# Altium PCB FlightController.PcbDoc (part 1 of 2)
Units mm, origin at the board's own origin, x right, y up, seen from the top; angles counter-clockwise.
Board outline 33 x 33 mm, 4 copper layers (Top Layer, Layer 2, Layer 3, Bottom Layer), stack 0.603 mm thick; 71 components, 54 nets, 321 pads, 115 vias.
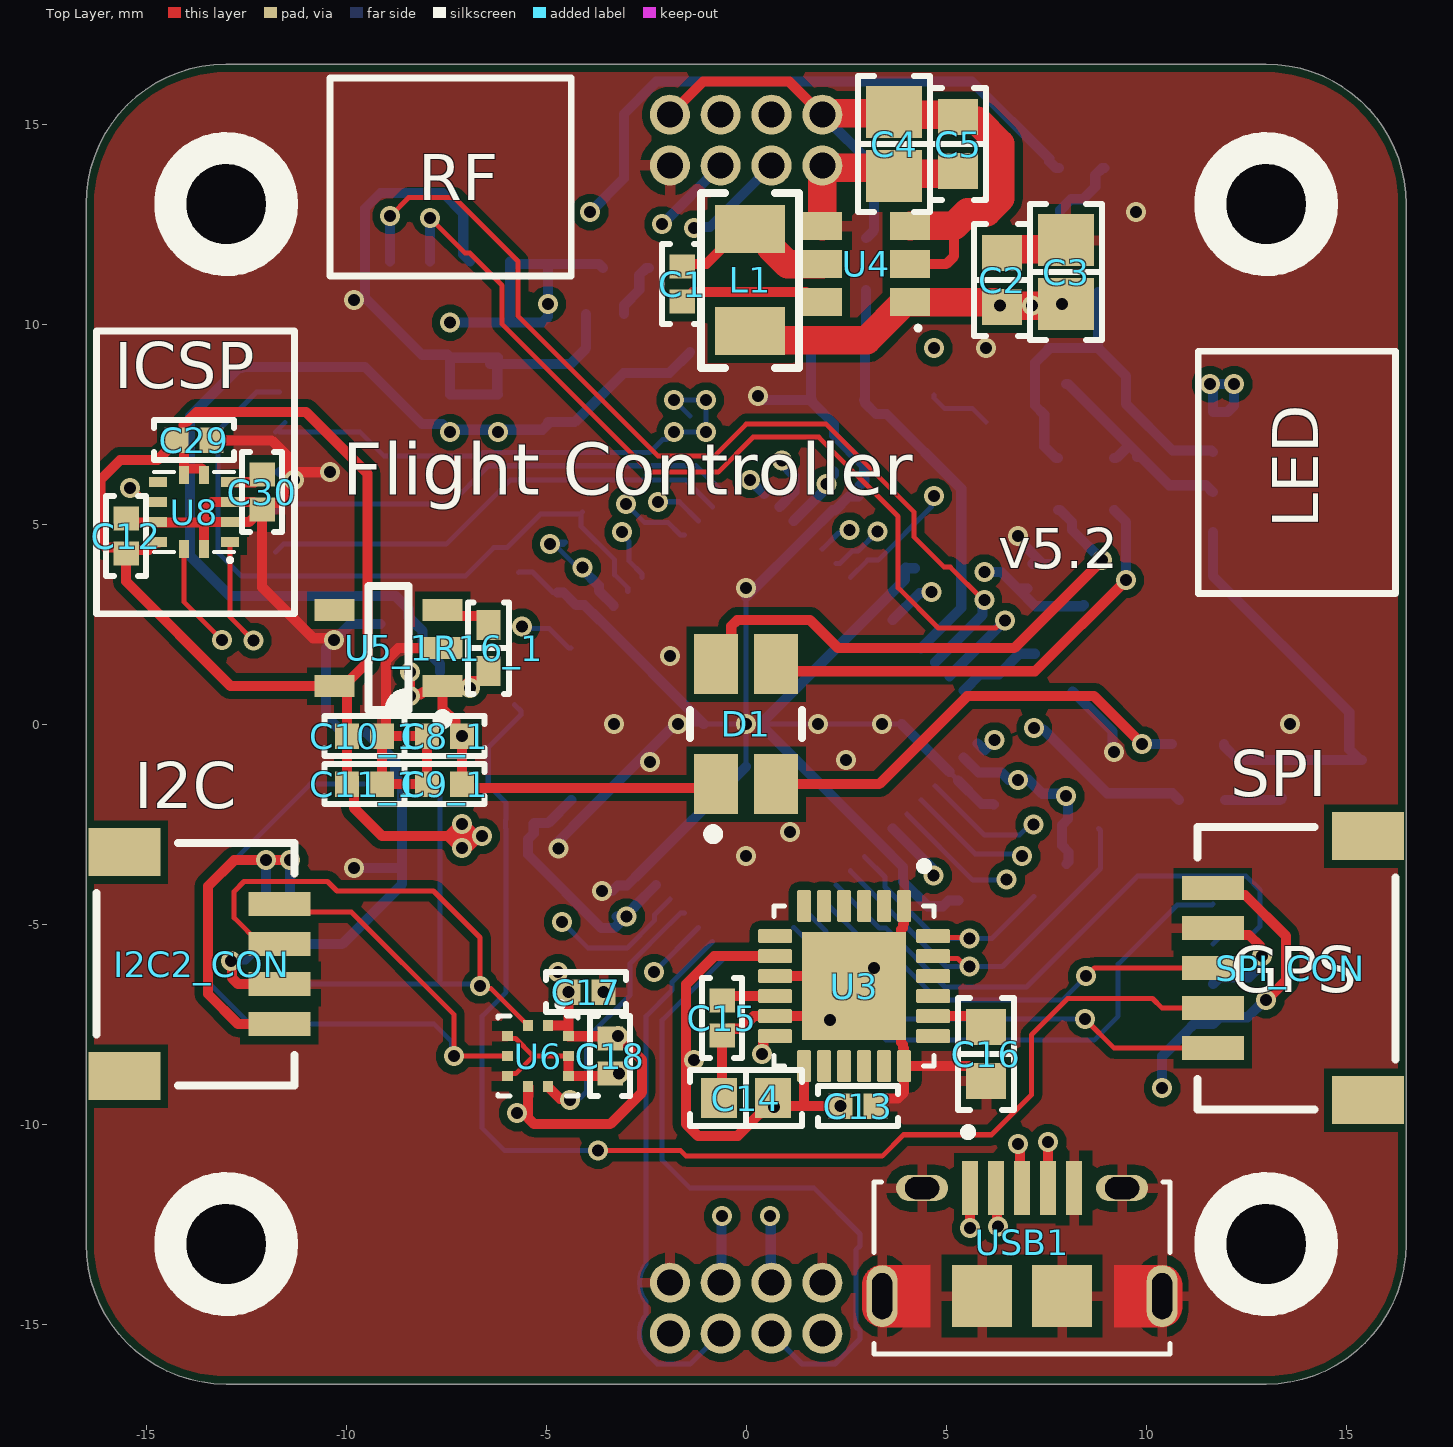
[diagram p0: Top Layer view]
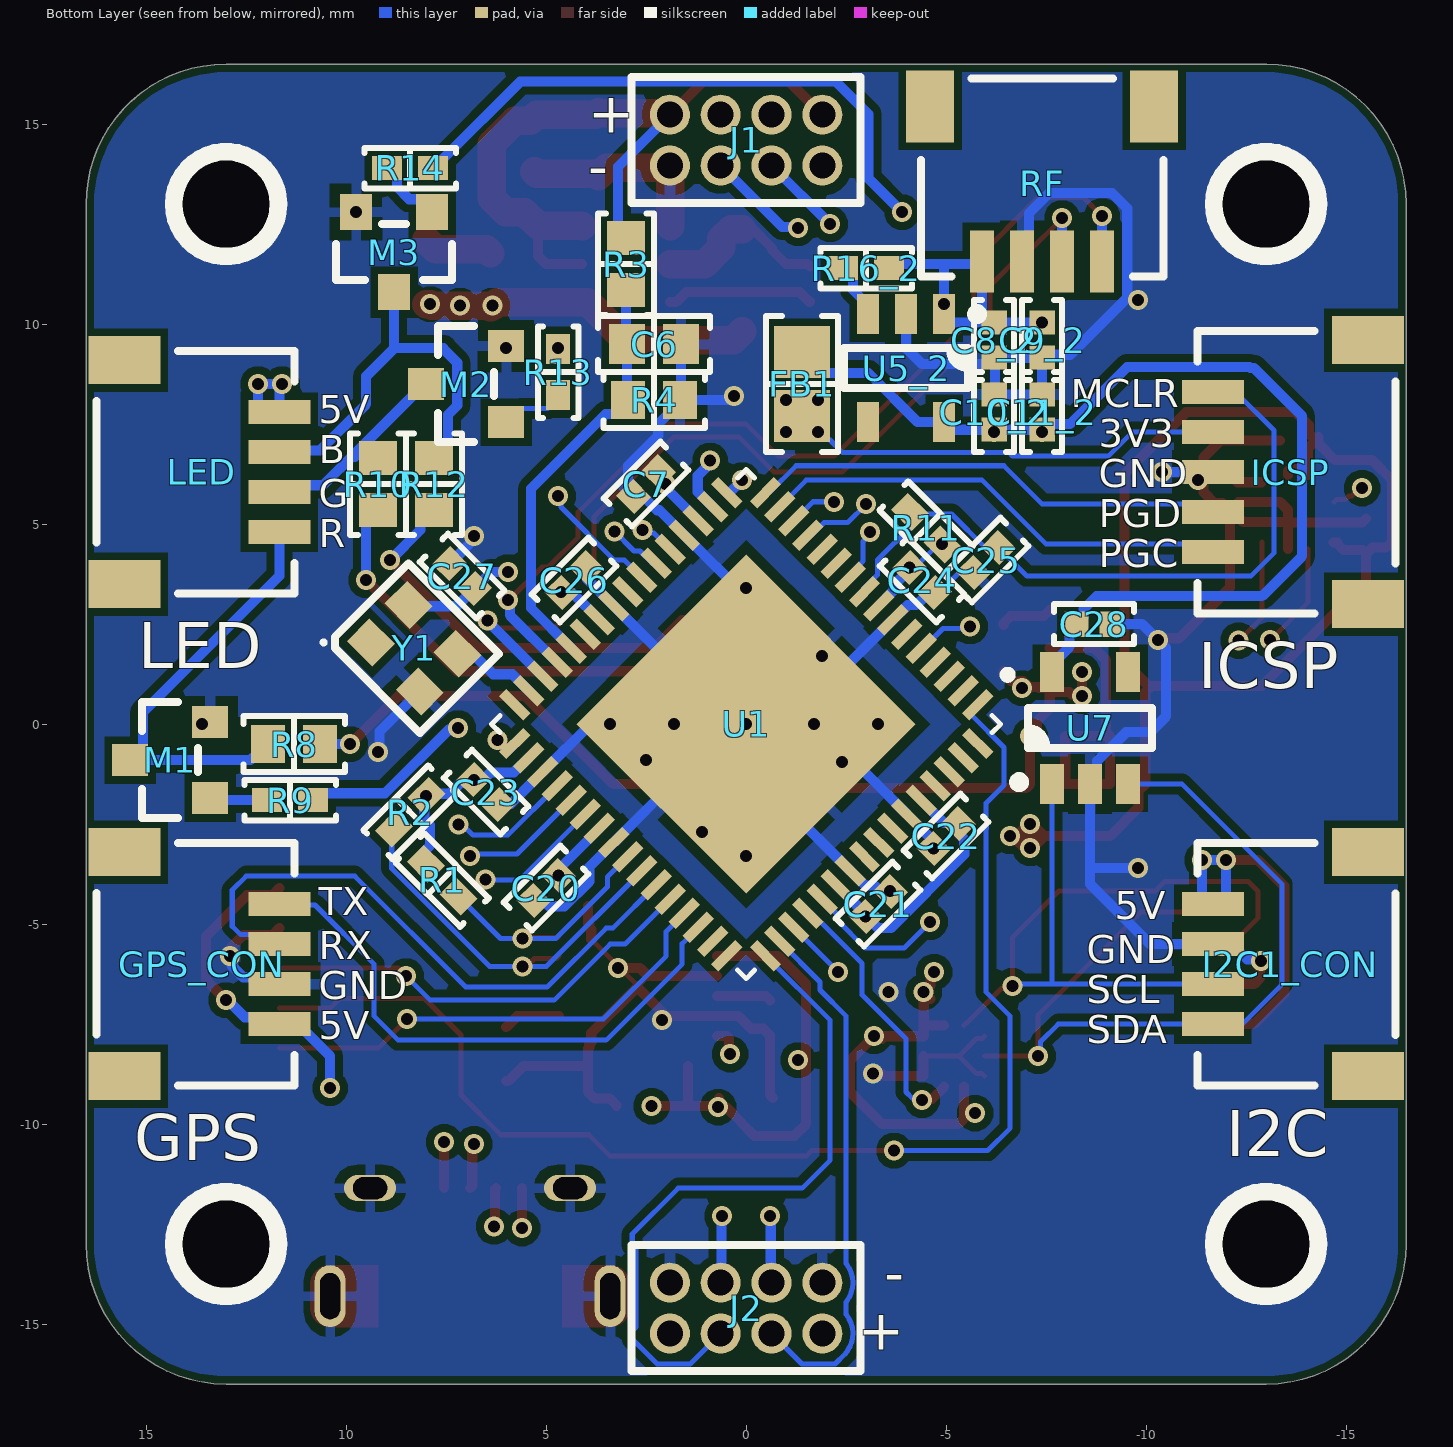
[diagram p1: Bottom Layer view, seen from below]
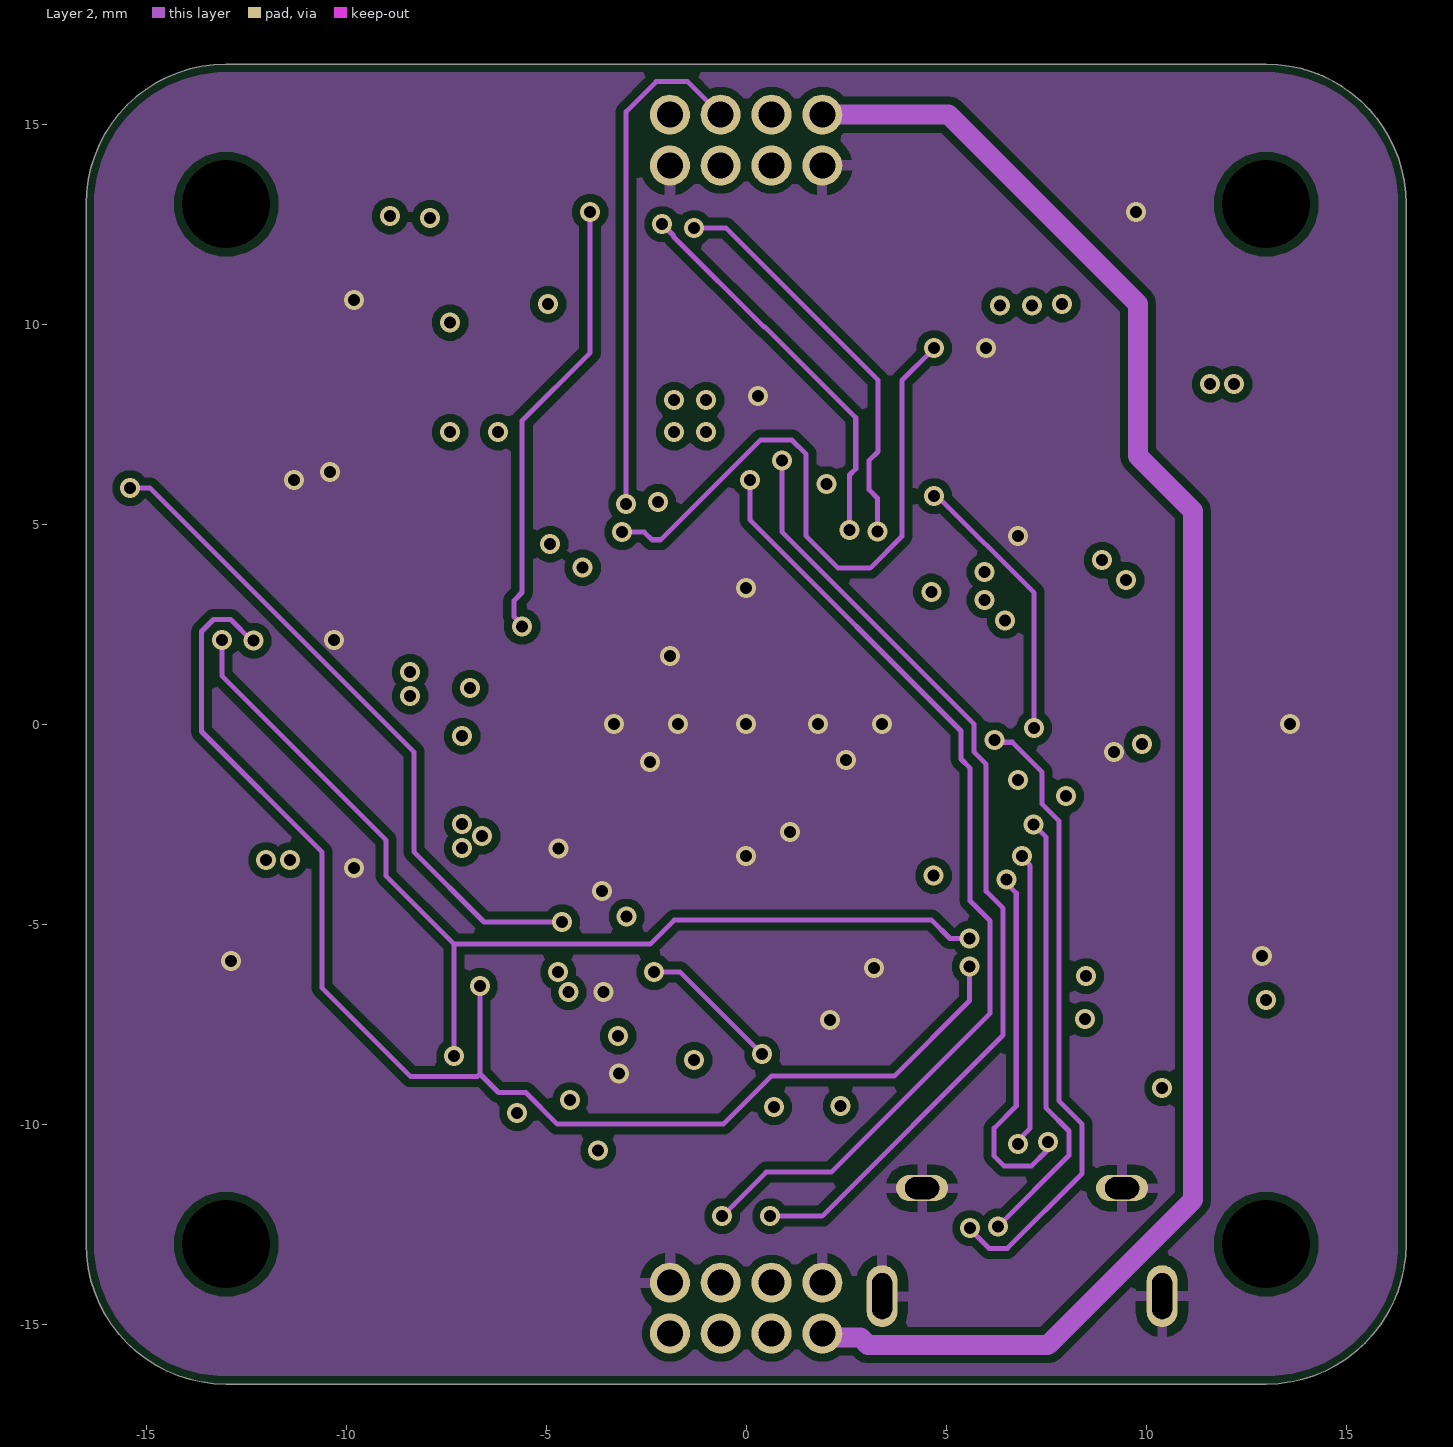
[diagram p2: Layer 2]
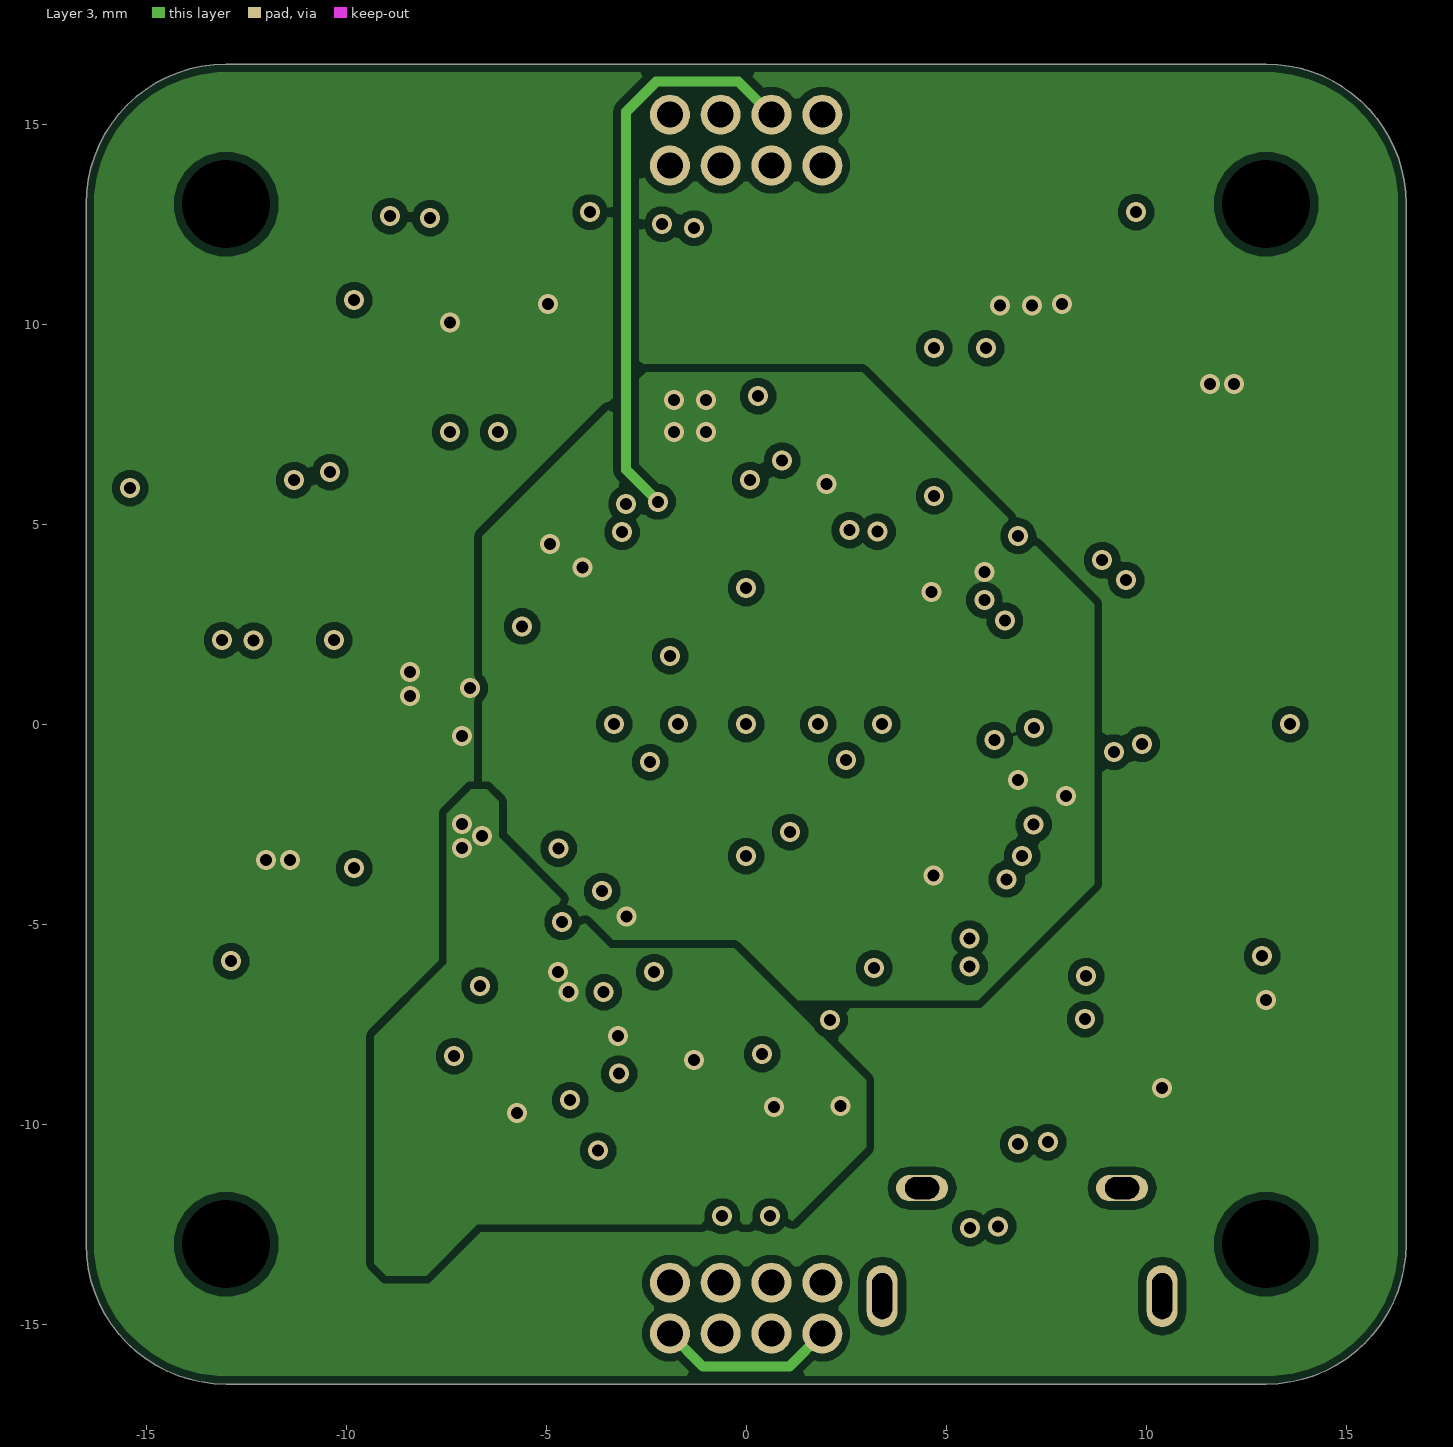
[diagram p3: Layer 3]

## Layer stack, top to bottom
Top Solder: solder mask 0.0102, Solder Resist, Dk 3.5
Top Layer: signal copper 0.0356
Dielectric 2: prepreg 0.0711, PP-006, Dk 4.1
Layer 2: signal copper 0.035
Dielectric 1: dielectric 0.32, FR-4, Dk 4.8
Layer 3: signal copper 0.035
Dielectric 3: prepreg 0.0711, PP-006, Dk 4.1
Bottom Layer: signal copper 0.0356
Bottom Solder: solder mask 0.0102, Solder Resist, Dk 3.5

## Board outline
-16.5,-13 -16.5,13 cw(c-13,13) -13,16.5 13,16.5 cw(c13,13) 16.5,13 16.5,-13 cw(c13,-13) 13,-16.5 -13,-16.5 cw(c-13,-13)

## Design rules (kind name [scope] priority, off if disabled: settings)
BoardOutlineClearance [All] p1: gap=0.2 ignorepadtopadclearanceinfootprint=FALSE
Clearance "PolyGon Pour Clearance" [InPolygon] p1: gap=0.2 ignorepadtopadclearanceinfootprint=FALSE
Clearance [All] p2: gap=0.2 ignorepadtopadclearanceinfootprint=TRUE except(0: Arc-Hole Track-Hole SMDPad-Hole THPad-Hole Via-Hole Fill-Hole Poly-Hole Region-Hole Text-Hole)
HoleSize [All] p1: absolutevalues=TRUE maxlimit=6.3 minlimit=0.02 maxpercent=80.000 minpercent=20.000
PolygonConnect PolygonRelief [IsPolygon and not (IsNamedPolygon('PolygonDirect'))] p1: thpad.connectstyle=Relief thpad.reliefconductorwidth=0.254 thpad.reliefentries=4 thpad.polygonreliefangle="90 Angle" thpad.airgapwidth=0.254 smdpad.connectstyle=Relief smdpad.reliefconductorwidth=0.254 smdpad.reliefentries=4 smdpad.polygonreliefangle="90 Angle" smdpad.airgapwidth=0.254 via.connectstyle=Direct via.reliefconductorwidth=0.254 via.reliefentries=4 via.polygonreliefangle="90 Angle" via.airgapwidth=0.254
PolygonConnect [All] p2: connectstyle=Direct reliefconductorwidth=0.254 reliefentries=4 polygonreliefangle="90 Angle" airgapwidth=0.254
RoutingVias [All] p1: holewidth=0.3 width=0.5 viastyle="Through Hole" minholewidth=0.3 minwidth=0.5 maxholewidth=0.7 maxwidth=1.27
SolderMaskExpansion [All] p1: expansion=0.102 istentingtop=FALSE
Width [All] p1: maxlimit=0.712 minlimit=0.127 preferedwidth=0.254
29 further rules are at their usual default settings.

## Classes and differential pairs
component class U_MPU6050: C13 C14 C15 C16 U3
component class U_LIS3MDL: C12 C29 C30 U8
component class U_BMP390: C17 C18 U6
component class U_5V_buck: C1 C2 C3 C4 C5 L1 U4
component class U_PIC32MZ: C6 C7 C20 C21 C22 C23 C24 C25 C26 C27 ICSP J1 J2 R1 R2 R3 R4 R11 U1 USB1 Y1
component class U_3V3_LDO_MCU: C8_2 C9_2 C10_2 C11_2 R16_2 U5_2
component class U_3V3_LDO_IMU: C8_1 C9_1 C10_1 C11_1 R16_1 U5_1
channel class 3V3_LDO: U_3V3_LDO_IMU U_3V3_LDO_MCU

## Components (designator, comment, footprint, x,y, rotation, side; value= is the part's Value field where it differs from the comment)
C1 "1 µF" "CAP 0402_1005" -1.6,11 r90 top
C2 "1µF" "CAP 0603_1608" 6.4,11.1 r270 top
C3 "22µF" "CAP 0805_2012" 8,11.3 r270 top
C4 "22µF" "CAP 0805_2012" 3.7,14.5 r90 top
C5 "0.1µF" "CAP 0603_1608" 5.3,14.5 r270 top
C6 "0.01µF" "CAP 0603_1608" 2.3,9.5 r180 bottom
C7 "0.1 µF" "CAP 0402_1005" 2.5,6 r135 bottom
C8_1 "1 µF" "CAP 0402_1005" -7.54,-0.3 r0 top (schematic designator C8)
C8_2 "1 µF" "CAP 0402_1005" -6.2,9.6 r90 bottom (schematic designator C8)
C9_1 "0.1 µF" "CAP 0402_1005" -7.54,-1.5 r0 top (schematic designator C9)
C9_2 "0.1 µF" "CAP 0402_1005" -7.4,9.6 r90 bottom (schematic designator C9)
C10_1 "0.1 µF" "CAP 0402_1005" -9.54,-0.3 r180 top (schematic designator C10)
C10_2 "0.1 µF" "CAP 0402_1005" -6.2,7.8 r270 bottom (schematic designator C10)
C11_1 "1 µF" "CAP 0402_1005" -9.54,-1.5 r180 top (schematic designator C11)
C11_2 "1 µF" "CAP 0402_1005" -7.4,7.8 r270 bottom (schematic designator C11)
C12 "1 µF" "CAP 0402_1005" -15.5,4.7 r90 top
C13 "0.1 µF" "CAP 0402_1005" 2.8,-9.55 r0 top
C14 "0.01µF" "CAP 0603_1608" 0,-9.35 r0 top
C15 "0.1 µF" "CAP 0402_1005" -0.6,-7.35 r270 top
C16 "2200pF" "CAP 0603_1608" 6,-8.25 r270 top
C17 "0.1 µF" "CAP 0402_1005" -4,-6.7 r180 top
C18 "0.1 µF" "CAP 0402_1005" -3.4,-8.3 r90 top
C20 "0.1 µF" "CAP 0402_1005" 5,-4.1 r135 bottom
C21 "0.1 µF" "CAP 0402_1005" -3.3,-4.5 r315 bottom
C22 "0.1 µF" "CAP 0402_1005" -5,-2.8 r135 bottom
C23 "0.1 µF" "CAP 0402_1005" 6.5,-1.7 r45 bottom
C24 "0.1 µF" "CAP 0402_1005" -4.4,3.6 r45 bottom
C25 "0.1 µF" "CAP 0402_1005" -6,4.1 r315 bottom
C26 "0.1 µF" "CAP 0402_1005" 4.3,3.6 r315 bottom
C27 "0.1 µF" "CAP 0402_1005" 7.1,3.7 r225 bottom
C28 "0.1 µF" "CAP 0402_1005" -8.7,2.5 r0 bottom
C29 "0.1 µF" "CAP 0402_1005" -13.8,7.1 r0 top
C30 "0.1 µF" "CAP 0402_1005" -12.1,5.8 r270 top
D1 "RGB LED 3228" "CreeLED 3228" 0,0 r90 top
FB1 "=Value" "FER 0805_2012" -1.4,8.5 r270 bottom
GPS_CON "SM04B-SRSS-TB(LF)(SN)" "JST SM04B-SRSS-TB" 13.7,-6 r90 bottom
I2C1_CON "SM04B-SRSS-TB(LF)(SN)" "JST SM04B-SRSS-TB" -13.7,-6 r270 bottom
I2C2_CON "SM04B-SRSS-TB(LF)(SN)" "JST SM04B-SRSS-TB" -13.7,-6 r90 top
ICSP "SM05B-SRSS-TB(LF)(SN)" "JST SM05B-SRSS-TB" -13.7,6.3 r270 bottom
J1 "62200821821" 62200821821 0,14.6 r180 bottom
J2 "62200821821" 62200821821 0,-14.6 r0 bottom
L1 "4.7µH" "IND 1008_2520" 0.1,11.1 r270 top
LED "SM04B-SRSS-TB(LF)(SN)" "JST SM04B-SRSS-TB" 13.7,6.3 r90 bottom
M1 "BSS123-7-F" "DIODES SOT-23-3" 14.4,-0.9 r0 bottom
M2 "BSS123-7-F" "DIODES SOT-23-3" 7,8.5 r0 bottom
M3 "BSS123-7-F" "DIODES SOT-23-3" 8.8,11.8 r270 bottom
R1 "4.7k Ohms" "RES 0402_1005" 7.6,-3.9 r45 bottom
R2 "4.7k Ohms" "RES 0402_1005" 8.4,-2.2 r135 bottom
R3 "10k" "RES 0603_1608" 3,11.5 r90 bottom
R4 "2k" "RES 0603_1608" 2.3,8.1 r0 bottom
R8 "330 Ohms" "RES 0603_1608" 11.3,-0.5 r180 bottom
R9 "1k Ohms" "RES 0402_1005" 11.4,-1.9 r180 bottom
R10 "330 Ohms" "RES 0603_1608" 9.2,6 r270 bottom
R11 "10k Ohms" "RES 0402_1005" -4.5,4.9 r225 bottom
R12 "330 Ohms" "RES 0603_1608" 7.8,6 r270 bottom
R13 "1k Ohms" "RES 0402_1005" 4.7,8.8 r90 bottom
R14 "1k Ohms" "RES 0402_1005" 8.4,13.9 r180 bottom
R16_1 "10k Ohms" "RES 0402_1005" -6.44,1.9 r270 top (schematic designator R16)
R16_2 "10k Ohms" "RES 0402_1005" -3,11.4 r180 bottom (schematic designator R16)
RF "SM04B-SRSS-TB(LF)(SN)" "JST SM04B-SRSS-TB" -7.4,13.6 r180 bottom
SPI_CON "SM05B-SRSS-TB(LF)(SN)" "JST SM05B-SRSS-TB" 13.7,-6.1 r270 top
U1 "PIC32MZ0512EFE064" QFN50P900X900X100-65N 0,0 r315 bottom
U3 "MPU6050" IC_MPU6050 2.7,-6.55 r270 top
U4 "5V Buck" "TSOT-26-6 - 3.2mm" 3,11.5 r270 top
U5_1 "MIC5504" "TI SOT-23-5 DBV" -8.94,1.9 r180 top (schematic designator U5)
U5_2 "MIC5504" "TI SOT-23-5 DBV" -4,8.9 r270 bottom (schematic designator U5)
U6 "BMP390" BMP390L -5.2,-8.3 r0 top
U7 "24LC00" SOT-23-5 -8.6,-0.1 r180 bottom
U8 "LIS3MDL" LGA12_ST -13.8,5.3 r180 top
USB1 "Mirco USB port" AMPHENOL_10118194-0001LF 6.9,-14.3 r0 top
Y1 "27MHz" "ABRACON ASD" 8.3,1.9 r225 bottom

## Footprints (in the part's own frame and the unit in brackets; to place one, negate y for a bottom-side part, rotate by r counter-clockwise, add the part's x,y. Pads: shape width x height; smd on the part's side, far side on the other; paste and mask are expansions set on the pad)
62200821821 [mm] "Socket Header, Pitch 1.27 mm, THT, Vertical, dual row, 8p"
  round 1 hole 0.65: 1(-1.905,-0.635) 2(-1.905,0.635) 3(-0.635,-0.635) 4(-0.635,0.635) 5(0.635,-0.635) 6(0.635,0.635) 7(1.905,-0.635) 8(1.905,0.635)
  silkscreen extent -2.87,-1.58 2.87,1.58, body extent -2.74,-1.5 2.74,1.5, height 4.55
"ABRACON ASD" [mm] "Crystal, 4-Leads, Body 2.00x2.45mm, Pitch 1.65mm, IPC Medium Density"
  rect 0.9x0.8 smd: 1(-0.865,-0.665) 2(0.865,-0.665) 3(0.865,0.665) 4(-0.865,0.665)
  silkscreen extent -1.75,-1.55 1.6,1.4, body extent -1.27,-1.02 1.28,1.03, height 1
AMPHENOL_10118194-0001LF [mm]
  rect 0.4x1.35 smd: 1(-1.3,2.7) 2(-0.65,2.7) 3(0,2.7) 4(0.65,2.7) 5(1.3,2.7)
  oval 1.3x0.65 hole 0.55 slot 0.85 at 0 deg: S1(-2.5,2.7) S2(2.5,2.7)
  oval 0.775x1.55 hole 0.5 slot 1.15 at 90 deg: S3(-3.5,0) S6(3.5,0)
  rect 1.5x1.55 smd: S4(-1,0) S5(1,0)
  Top Layer region: 193 vertices and 0 holes, not listed, extent -4,-0.775 -2.3,0.78
  Top Layer region: 193 vertices and 0 holes, not listed, extent 2.3,-0.78 4,0.775
  silkscreen extent -3.7,-1.45 3.7,4.2, body extent -4.02,-2.7 4.03,3.1, height 2.7
BMP390L [mm]
  rect 0.25x0.275 smd: 1(0.25,0.763) 2(-0.25,0.763) 6(-0.25,-0.763) 7(0.25,-0.763)
  rect 0.275x0.25 smd: 3(-0.763,0.5) 4(-0.763,0) 5(-0.763,-0.5) 8(0.763,-0.5) 9(0.763,0) 10(0.763,0.5)
  silkscreen extent -1,-1 1,1.36, body extent -1,-1 1,1, height 0.75
"CAP 0402_1005" [mm] "Chip Capacitor, 2-Leads, Body 1.02x0.51mm, IPC Medium Density"
  rect 0.6x0.64 smd: 1(-0.44,0) 2(0.44,0)
  silkscreen extent -1,-0.5 1,0.5, body extent -0.5,-0.26 0.5,0.26, height 0.52
"CAP 0603_1608" [mm] "Chip Capacitor, 2-Leads, Body 1.60x0.80mm, IPC Medium Density"
  rect 0.9x1 smd: 1(-0.675,0) 2(0.675,0)
  silkscreen extent -1.4,-0.7 1.4,0.7, body extent -0.8,-0.41 0.8,0.41, height 0.82
"CAP 0805_2012" [mm] "Chip Capacitor, 2-Leads, Body 2.00x1.20mm, IPC Medium Density"
  rect 1.3x1.4 smd: 1(-0.8,0) 2(0.8,0)
  silkscreen extent -1.7,-0.9 1.7,0.9, body extent -1,-0.64 1,0.64, height 1.26
"CreeLED 3228" [mm]
  rect 1.5x1.1 smd paste+0 mask+0: 1(-1.5,0.75) 2(-1.5,-0.75) 3(1.5,-0.75) 4(1.5,0.75)
  silkscreen extent -2.87,-1.4 0.35,1.4, body extent -1.75,-1.4 1.75,1.4, height 1.9
"DIODES SOT-23-3" [mm] "SOT23, 3-Leads, Body 2.90x2.40mm, Pitch 0.95mm, IPC Medium Density"
  rect 0.9x0.8 smd: 1(-1,0.95) 2(-1,-0.95) 3(1,0)
  silkscreen extent -0.7,-1.45 0.7,1.45, body extent -1.41,-1.45 1.41,1.45, height 1.5
"FER 0805_2012" [mm] "Chip Ferrite, 2-Leads, Body 2.00x1.20mm, IPC Medium Density"
  rect 1.3x1.4 smd: 1(-0.8,0) 2(0.8,0)
  silkscreen extent -1.7,-0.9 1.7,0.9, body extent -1,-0.64 1,0.64, height 1.26
IC_MPU6050 [mm]
  rrect25% 0.8x0.35 smd: 1(-2,1.25) 2(-2,0.75) 3(-2,0.25) 4(-2,-0.25) 5(-2,-0.75) 6(-2,-1.25) 13(2,-1.25) 14(2,-0.75) 15(2,-0.25) 16(2,0.25) 17(2,0.75) 18(2,1.25)
  rrect25% 0.35x0.85 smd: 7(-1.25,-1.975) 8(-0.75,-1.975) 9(-0.25,-1.975) 10(0.25,-1.975) 11(0.75,-1.975) 12(1.25,-1.975) 19(1.25,1.975) 20(0.75,1.975) 21(0.25,1.975) 22(-0.25,1.975) 23(-0.75,1.975) 24(-1.25,1.975)
  rect 2.7x2.6 smd paste-2: 25(0,0)
  silkscreen extent -3.1,-2 2,2, body extent -2,-2 2,2, height 0.93
"IND 1008_2520" [mm] "Chip Inductance, 2-leads, Body 2.5x2.1mm, IPC Medium Density"
  rect 1.2x1.75 smd: 1(-1.275,0) 2(1.275,0)
  silkscreen extent -2.18,-1.22 2.2,1.22, body extent -1.3,-1.05 1.3,1.05, height 1
"JST SM04B-SRSS-TB" [mm] "1.0mm pitch/Disconnectable Crimp style connector"
  rect 0.6x1.55 smd: 1(-1.5,-2.032) 2(-0.5,-2.032) 3(0.5,-2.032) 4(1.5,-2.032)
  rect 1.2x1.8 smd: M(-2.8,1.843) M(2.8,1.843)
  silkscreen extent -3.03,-2.41 3.03,2.54, body extent -3,-2.38 3,2.57, height 2.95
"JST SM05B-SRSS-TB" [mm] "1.0mm pitch/Disconnectable Crimp style connector"
  rect 0.6x1.55 smd: 1(-2,-2.032) 2(-1,-2.032) 3(0,-2.032) 4(1,-2.032) 5(2,-2.032)
  rect 1.2x1.8 smd: M(-3.3,1.843) M(3.3,1.843)
  silkscreen extent -3.53,-2.41 3.53,2.54, body extent -3.5,-2.38 3.5,2.57, height 2.95
LGA12_ST [mm]
  rect 0.45x0.25 smd: 1(-0.9,0.75) 2(-0.9,0.25) 3(-0.9,-0.25) 4(-0.9,-0.75) 7(0.9,-0.75) 8(0.9,-0.25) 9(0.9,0.25) 10(0.9,0.75)
  rect 0.25x0.45 smd: 5(-0.25,-0.925) 6(0.25,-0.925) 11(0.25,0.925) 12(-0.25,0.925)
  silkscreen extent -1,-1 1,1.25, body extent -1,-1 1,1, height 0.25
QFN50P900X900X100-65N [mm]
  rect 0.86x0.26 smd: 1(-4.435,3.75) 2(-4.435,3.25) 3(-4.435,2.75) 4(-4.435,2.25) 5(-4.435,1.75) 6(-4.435,1.25) 7(-4.435,0.75) 8(-4.435,0.25) 9(-4.435,-0.25) 10(-4.435,-0.75) 11(-4.435,-1.25) 12(-4.435,-1.75) 13(-4.435,-2.25) 14(-4.435,-2.75) 15(-4.435,-3.25) 16(-4.435,-3.75) 33(4.435,-3.75) 34(4.435,-3.25) 35(4.435,-2.75) 36(4.435,-2.25) 37(4.435,-1.75) 38(4.435,-1.25) 39(4.435,-0.75) 40(4.435,-0.25) 41(4.435,0.25) 42(4.435,0.75) 43(4.435,1.25) 44(4.435,1.75) 45(4.435,2.25) 46(4.435,2.75) 47(4.435,3.25) 48(4.435,3.75)
  rect 0.26x0.86 smd: 17(-3.75,-4.435) 18(-3.25,-4.435) 19(-2.75,-4.435) 20(-2.25,-4.435) 21(-1.75,-4.435) 22(-1.25,-4.435) 23(-0.75,-4.435) 24(-0.25,-4.435) 25(0.25,-4.435) 26(0.75,-4.435) 27(1.25,-4.435) 28(1.75,-4.435) 29(2.25,-4.435) 30(2.75,-4.435) 31(3.25,-4.435) 32(3.75,-4.435) 49(3.75,4.435) 50(3.25,4.435) 51(2.75,4.435) 52(2.25,4.435) 53(1.75,4.435) 54(1.25,4.435) 55(0.75,4.435) 56(0.25,4.435) 57(-0.25,4.435) 58(-0.75,4.435) 59(-1.25,4.435) 60(-1.75,4.435) 61(-2.25,4.435) 62(-2.75,4.435) 63(-3.25,4.435) 64(-3.75,4.435)
  rect 6x6 smd: 65(0,0)
  silkscreen extent -5.59,-4.5 4.5,4.5, body extent -4.52,-4.52 4.52,4.52, height 0.9
"RES 0402_1005" [mm] "Chip Resistor, 2-Leads, Body 1.0x0.5mm, IPC Medium Density"
  rect 0.75x0.6 smd: 1(-0.575,0) 2(0.575,0)
  silkscreen extent -1.14,-0.51 1.14,0.51, body extent -0.5,-0.25 0.5,0.25, height 0.35
"RES 0603_1608" [mm] "Chip Resistor, 2-Leads, Body 1.60x0.80mm, IPC Medium Density"
  rect 0.85x0.95 smd: 1(-0.65,0) 2(0.65,0)
  silkscreen extent -1.27,-0.7 1.27,0.7, body extent -0.8,-0.4 0.8,0.4, height 0.45
SOT-23-5 [mm]
  rect 0.6x1 smd: 1(-0.95,-1.4) 2(0,-1.4) 3(0.95,-1.4) 4(0.95,1.4) 5(-0.95,1.4)
  silkscreen extent -1.9,-1.47 1.55,0.5, body extent -1.48,-1.44 1.42,1.39, height 1.5
"TI SOT-23-5 DBV" [mm] "SOT23, 5-Leads, Body 2.90x2.80mm, Pitch 0.95mm, IPC Medium Density"
  rect 1x0.55 smd: 1(-1.35,0.95) 2(-1.35,0) 3(-1.35,-0.95) 4(1.35,-0.95) 5(1.35,0.95)
  silkscreen extent -1.48,-1.55 0.5,1.9, body extent -1.44,-1.42 1.39,1.48, height 1.5
"TSOT-26-6 - 3.2mm" [mm]
  rect 0.7x1 smd: 1(0.95,1.1) 2(0,1.1) 3(-0.95,1.1) 4(-0.95,-1.1) 5(0,-1.1) 6(0.95,-1.1)
  silkscreen extent 1.55,1.25 1.65,1.36, body extent -1.45,-1.2 1.45,1.2, height 1

## Part data
C1 C8_1 C8_2 C11_1 C11_2 C12: library part C0402C104K4RACAUTO, "CAP CER 0.1UF 16V X7R 0402", Capacitance="0.1 µF", Device Package="0402 (1005 Metric)", Manufacturer=KEMET, Operating Temperature="-55°C ~ 125°C", Ratings=AEC-Q200, Supplier Part Number 1=399-6828-1-ND, Temperature Coefficient=X7R, Tolerance=±10%, Voltage - Rated=16V, Applications="Automotive, Bypass, Decoupling", ComponentLink1Description=Datasheet, ComponentLink1URL=https://api.kemet.com/component-edge/download/specsheet/C0402C104K4RACAUTO.pdf, ComponentLink2Description="DigiKey Link", ComponentLink2URL=https://www.digikey.com/en/products/detail/kemet/C0402C104K4RACAUTO/3314827, LastUpdated="8/14/2022 9:05:51 PM", Lifecycle Status=Active, Minimum Order=1, Mounting Type="Surface Mount, MLCC", Package / Case="0402 (1005 Metric)", Packaging=TapeAndReel, Part Number=C0402C104K4RACAUTO, Part Status=Active, PartId=3024, Price=0.01, Series="SMD Auto X7R", Size / Dimension="0.039\" L x 0.020\" W (1.00mm x 0.50mm)", Supplier 1=DigiKey, Thickness (Max)="0.022\" (0.55mm)"
C2: library part GCJ188R71E105KA01D, "CAP CER 1UF 25V X7R 0603", Device Package="0603 (1608 Metric)", Manufacturer="Murata Electronics", Operating Temperature="-55°C ~ 125°C", Ratings=AEC-Q200, Supplier Part Number 1=490-14409-1-ND, Temperature Coefficient=X7R, Tolerance=±10%, Applications="Automotive, Boardflex Sensitive", Capacitance=1µF, ComponentLink1Description=Datasheet, ComponentLink1URL=https://search.murata.co.jp/Ceramy/image/img/A01X/G101/ENG/GCJ188R71E105KA01-01.pdf, ComponentLink2Description="DigiKey Link", ComponentLink2URL=http://digikey.com/product-detail/en/murata-electronics/GCJ188R71E105KA01D/490-14409-1-ND/6606870, Features="Soft Termination", LastUpdated="13-Aug-20 10:24:06 AM", Lifecycle Status=Active, Minimum Order=1, Mounting Type="Surface Mount, MLCC", Package / Case="0603 (1608 Metric)", Packaging=TapeAndReel, Part Number=GCJ188R71E105KA01D, Part Status=Active, PartId=9566, Price=0.05, Series=GCJ, Size / Dimension="0.063\" L x 0.031\" W (1.60mm x 0.80mm)", Supplier 1=DigiKey, Thickness (Max)="0.035\" (0.90mm)"
C3: library part CL21A226MOQNNNE, "CAP CER 22UF 16V X5R 0805", Device Package="0805 (2012 Metric)", Manufacturer="Samsung Electro-Mechanics", Operating Temperature="-55°C ~ 85°C", Supplier Part Number 1=1276-2909-1-ND, Temperature Coefficient=X5R, Tolerance=±20%, Voltage - Rated=16V, Applications="General Purpose", Capacitance=22µF, ComponentLink1Description=Datasheet, ComponentLink1URL=http://www.samsungsem.com/kr/support/product-search/mlcc/CL21A226MOQNNNE.jsp, ComponentLink2Description="DigiKey Link", ComponentLink2URL=http://digikey.com/product-detail/en/samsung-electro-mechanics/CL21A226MOQNNNE/1276-2909-1-ND/3890995, LastUpdated="21-Jan-20 12:03:05 AM", Lifecycle Status=Active, Minimum Order=1, Mounting Type="Surface Mount, MLCC", Package / Case="0805 (2012 Metric)", Packaging=TapeAndReel, Part Number=CL21A226MOQNNNE, Part Status=Active, PartId=3052, Price=0.11, Series=CL, Size / Dimension="0.079\" L x 0.049\" W (2.00mm x 1.25mm)", Supplier 1=DigiKey, Thickness (Max)="0.055\" (1.40mm)"
C4: library part C2012X7S1E106K125AC, "CAP CER 10UF 25V X7S 0805", Capacitance=10µF, Device Package="0805 (2012 Metric)", Manufacturer="TDK Corporation", Operating Temperature="-55°C ~ 125°C", Supplier Part Number 1=445-181600-1-ND, Temperature Coefficient=X7S, Tolerance=±10%, Voltage - Rated=25V, Applications="General Purpose", ComponentLink1Description=Datasheet, ComponentLink1URL=https://product.tdk.com/en/search/capacitor/ceramic/mlcc/info?part_no=C2012X7S1E106K125AC?ref_disty=digikey, ComponentLink2Description="DigiKey Link", ComponentLink2URL=http://digikey.com/product-detail/en/tdk-corporation/C2012X7S1E106K125AC/445-181600-1-ND/9991478, Features="Low ESL", LastUpdated="21-Jan-20 12:03:04 AM", Lifecycle Status=Active, Minimum Order=1, Mounting Type="Surface Mount, MLCC", Package / Case="0805 (2012 Metric)", Packaging=TapeAndReel, Part Number=C2012X7S1E106K125AC, Part Status=Active, PartId=3339, Price=0.15, Series=C, Size / Dimension="0.079\" L x 0.049\" W (2.00mm x 1.25mm)", Supplier 1=DigiKey, Thickness (Max)="0.057\" (1.45mm)"
C5: library part GCG188R92A104KA03D, "CAP CER 0.1UF 100V 0603 EPOXY", Device Package="0603 (1608 Metric)", Manufacturer="Murata Electronics", Operating Temperature="-55°C ~ 150°C", Ratings=AEC-Q200, Supplier Part Number 1=490-18197-1-ND, Temperature Coefficient=X8R, Tolerance=±10%, Voltage - Rated=100V, Applications=Automotive, Capacitance=0.1µF, ComponentLink1Description=Datasheet, ComponentLink1URL=https://search.murata.co.jp/Ceramy/image/img/A01X/G101/ENG/GCG188R92A104KA03-01.pdf, ComponentLink2Description="DigiKey Link", ComponentLink2URL=http://digikey.com/product-detail/en/murata-electronics/GCG188R92A104KA03D/490-18197-1-ND/9867926, Features="Epoxy Mountable", LastUpdated="21-Jan-20 12:01:59 AM", Lifecycle Status=Active, Minimum Order=1, Mounting Type="Surface Mount, MLCC, Epoxy", Package / Case="0603 (1608 Metric)", Packaging=TapeAndReel, Part Number=GCG188R92A104KA03D, Part Status=Active, PartId=9025, Price=0.07, Series=GCG, Size / Dimension="0.063\" L x 0.031\" W (1.60mm x 0.80mm)", Supplier 1=DigiKey, Thickness (Max)="0.035\" (0.90mm)"
C6: library part GCG188R92A104KA03D, "CAP CER 0.1UF 100V 0603 EPOXY", Capacitance=0.1µF, Device Package="0603 (1608 Metric)", Manufacturer="Murata Electronics", Operating Temperature="-55°C ~ 150°C", Ratings=AEC-Q200, Supplier Part Number 1=490-18197-1-ND, Temperature Coefficient=X8R, Tolerance=±10%, Voltage - Rated=100V, Applications=Automotive, ComponentLink1Description=Datasheet, ComponentLink1URL=https://search.murata.co.jp/Ceramy/image/img/A01X/G101/ENG/GCG188R92A104KA03-01.pdf, ComponentLink2Description="DigiKey Link", ComponentLink2URL=http://digikey.com/product-detail/en/murata-electronics/GCG188R92A104KA03D/490-18197-1-ND/9867926, Features="Epoxy Mountable", LastUpdated="21-Jan-20 12:01:59 AM", Lifecycle Status=Active, Minimum Order=1, Mounting Type="Surface Mount, MLCC, Epoxy", Package / Case="0603 (1608 Metric)", Packaging=TapeAndReel, Part Number=GCG188R92A104KA03D, Part Status=Active, PartId=9025, Price=0.07, Series=GCG, Size / Dimension="0.063\" L x 0.031\" W (1.60mm x 0.80mm)", Supplier 1=DigiKey, Thickness (Max)="0.035\" (0.90mm)"
C7 C9_1 C9_2 C10_1 C10_2 C13 C15 C17 C18 C20 C21 C22 C23 C24 C25 C26 C27 C28 C29 C30: library part C0402C104K4RACAUTO, "CAP CER 0.1UF 16V X7R 0402", Device Package="0402 (1005 Metric)", Manufacturer=KEMET, Operating Temperature="-55°C ~ 125°C", Ratings=AEC-Q200, Supplier Part Number 1=399-6828-1-ND, Temperature Coefficient=X7R, Tolerance=±10%, Voltage - Rated=16V, Applications="Automotive, Bypass, Decoupling", Capacitance="0.1 µF", ComponentLink1Description=Datasheet, ComponentLink1URL=https://api.kemet.com/component-edge/download/specsheet/C0402C104K4RACAUTO.pdf, ComponentLink2Description="DigiKey Link", ComponentLink2URL=https://www.digikey.com/en/products/detail/kemet/C0402C104K4RACAUTO/3314827, LastUpdated="8/14/2022 9:05:51 PM", Lifecycle Status=Active, Minimum Order=1, Mounting Type="Surface Mount, MLCC", Package / Case="0402 (1005 Metric)", Packaging=TapeAndReel, Part Number=C0402C104K4RACAUTO, Part Status=Active, PartId=3024, Price=0.01, Series="SMD Auto X7R", Size / Dimension="0.039\" L x 0.020\" W (1.00mm x 0.50mm)", Supplier 1=DigiKey, Thickness (Max)="0.022\" (0.55mm)"
C14: library part C0603C103KARACAUTO, "CAP CER 0.01UF 250V X7R 0603", Device Package="0603 (1608 Metric)", Manufacturer=KEMET, Operating Temperature="-55°C ~ 125°C", Ratings=AEC-Q200, Supplier Part Number 1=399-17960-1-ND, Temperature Coefficient=X7R, Tolerance=±10%, Applications="Automotive, Bypass, Decoupling", Capacitance=0.01µF, ComponentLink1Description=Datasheet, ComponentLink1URL=https://api.kemet.com/component-edge/download/datasheet/C0603C103KARACAUTO.pdf, ComponentLink2Description="DigiKey Link", ComponentLink2URL=http://digikey.com/product-detail/en/kemet/C0603C103KARACAUTO/399-17960-1-ND/9084030, LastUpdated="13-Aug-20 10:21:06 AM", Lifecycle Status=Active, Minimum Order=1, Mounting Type="Surface Mount, MLCC", Package / Case="0603 (1608 Metric)", Packaging=TapeAndReel, Part Number=C0603C103KARACAUTO, Part Status=Active, PartId=15195, Price=0.25, Series="SMD Auto X7R", Size / Dimension="0.063\" L x 0.031\" W (1.60mm x 0.80mm)", Supplier 1=DigiKey, Thickness (Max)="0.034\" (0.87mm)"
C16: library part CGA3E2X8R1H222M080AD, "CAP CER 2200PF 50V 0603 EPOXY", Device Package="0603 (1608 Metric)", Manufacturer="TDK Corporation", Operating Temperature="-55°C ~ 150°C", Ratings=AEC-Q200, Supplier Part Number 1=445-9890-1-ND, Temperature Coefficient=X8R, Tolerance=±20%, Applications=Automotive, Capacitance=2200pF, ComponentLink1Description=Datasheet, ComponentLink1URL=https://product.tdk.com/info/en/catalog/datasheets/mlcc_automotive_epoxy_en.pdf?ref_disty=digikey, ComponentLink2Description="DigiKey Link", ComponentLink2URL=http://digikey.com/product-detail/en/tdk-corporation/CGA3E2X8R1H222M080AD/445-9890-1-ND/3931817, Features="Epoxy Mountable", LastUpdated="13-Aug-20 10:19:25 AM", Lifecycle Status=Active, Minimum Order=1, Mounting Type="Surface Mount, MLCC, Epoxy", Package / Case="0603 (1608 Metric)", Packaging=TapeAndReel, Part Number=CGA3E2X8R1H222M080AD, Part Status=Active, PartId=17643, Price=0.05, Series=CGA, Size / Dimension="0.063\" L x 0.031\" W (1.60mm x 0.80mm)", Supplier 1=DigiKey, Thickness (Max)="0.031\" (0.80mm)"
D1: "DIODE LED RGB DIFFUSED 4LCC SMD CLV1L-FKB-CJ1N1E1BB7B3B3", Digikey Part Number=CLV1L-FKB-CHMMQEHBB7673673-ND, Manufacturer=Cree, Mouser Part Number=941-CLV1LFKBC7673673, Package=LED_3MM2X2MM8, Temperature="-40°C to +100°C", Temperature Range High=+100°C, Temperature Range Low=-40°C, ComponentLink1Description=Upverter, ComponentLink1URL=https://upverter.com/upn/revision/9d0b31f7b1982705/, ComponentLink2Description=Datasheet, ComponentLink2URL=http://www.cree.com/~/media/Files/Cree/LED-Components-and-Modules/HB/Data-Sheets/CLV1L-FKB-1238.pdf, Digikey Description="DIODE LED RGB DIFFUSED 4LCC SMD", Lead Free=yes, Price=0.203999996142, RoHS=TRUE, Supplier 1=Digi-Key, Supplier 2=Mouser, Supplier Part Number 1=CLV1L-FKB-CHMMQEHBB7673673-ND, Supplier Part Number 2=941-CLV1LFKBC7673673
FB1: library part 2508051017Y0, "FERRITE BEAD 0805 1LN", Current Rating (Max)=300mA, DC Resistance (DCR) (Max)=200mOhm, Device Package="0805 (2012 Metric)", Manufacturer="Fair-Rite Products Corp.", Operating Temperature="-55°C ~ 125°C", Supplier Part Number 1=1934-1435-1-ND, ComponentLink1Description=Datasheet, ComponentLink1URL=http://www.fair-rite.com/wp-content/themes/fair-rite/print_product.php?pid=19091, ComponentLink2Description="DigiKey Link", ComponentLink2URL=http://digikey.com/product-detail/en/fair-rite-products-corp/2508051017Y0/1934-1435-1-ND/8594382, Filter Type="Signal Line", Height (Max)="0.043\" (1.10mm)", LastUpdated="9/2/2020 1:18:22 AM", Lifecycle Status=Active, Minimum Order=1, Mounting Type="Surface Mount", Number of Lines=1, Package / Case="0805 (2012 Metric)", Packaging=TapeAndReel, Part Number=2508051017Y0, Part Status=Active, PartId=1308, Price=0.02, Series=-, Size / Dimension="0.079\" L x 0.049\" W (2.00mm x 1.25mm)", Supplier 1=DigiKey
GPS_CON I2C1_CON I2C2_CON LED RF: "CONN HEADER SMD R/A 4POS 1MM", Current Rating (Amps)=0.7A, Insulation Color=Natural, Manufacturer="JST Sales America Inc.", Material Flammability Rating="UL94 V-0", Operating Temperature="-25°C ~ 85°C", Supplier Part Number 1=455-1804-1-ND, Voltage Rating=50V, ComponentLink1Description=Datasheet, ComponentLink1URL=http://www.jst-mfg.com/product/pdf/eng/eSH.pdf, ComponentLink2Description="DigiKey Link", ComponentLink2URL=http://digikey.com/product-detail/en/jst-sales-america-inc/SM04B-SRSS-TB-LF-SN/455-1804-1-ND/926875, Connector Type=Header, Contact Finish - Mating=Tin, Contact Finish - Post=Tin, Contact Material="Copper Alloy", Contact Shape=Square, Contact Type="Male Pin", Fastening Type=Push-Pull, Features="Solder Retention", Insulation Height="0.114\" (2.90mm)", Insulation Material="Polyamide (PA), Nylon", LastUpdated="1/12/2020 11:41:52 PM", Lifecycle Status=Active, Minimum Order=1, Mounting Type="Surface Mount, Right Angle", Number of Positions=4, Number of Positions Loaded=All, Number of Rows=1, Packaging=TapeAndReel, Part Number=SM04B-SRSS-TB(LF)(SN), Part Status=Active, PartId=62, Pitch - Mating="0.039\" (1.00mm)", Price=0.26, Series=SR, Shrouding="Shrouded - 4 Wall", Style="Board to Cable/Wire", Supplier 1=DigiKey, Termination=Solder
ICSP SPI_CON: "CONN HEADER SMD R/A 5POS 1MM", Current Rating (Amps)=0.7A, Insulation Color=Natural, Manufacturer="JST Sales America Inc.", Material Flammability Rating="UL94 V-0", Operating Temperature="-25°C ~ 85°C", Supplier Part Number 1=455-1805-1-ND, Voltage Rating=50V, ComponentLink1Description=Datasheet, ComponentLink1URL=http://www.jst-mfg.com/product/pdf/eng/eSH.pdf, ComponentLink2Description="DigiKey Link", ComponentLink2URL=http://digikey.com/product-detail/en/jst-sales-america-inc/SM05B-SRSS-TB-LF-SN/455-1805-1-ND/926876, Connector Type=Header, Contact Finish - Mating=Tin, Contact Finish - Post=Tin, Contact Material="Copper Alloy", Contact Shape=Square, Contact Type="Male Pin", Fastening Type=Push-Pull, Features="Solder Retention", Insulation Height="0.114\" (2.90mm)", Insulation Material="Polyamide (PA), Nylon", LastUpdated="1/12/2020 11:42:04 PM", Lifecycle Status=Active, Minimum Order=1, Mounting Type="Surface Mount, Right Angle", Number of Positions=5, Number of Positions Loaded=All, Number of Rows=1, Packaging=TapeAndReel, Part Number=SM05B-SRSS-TB(LF)(SN), Part Status=Active, PartId=63, Pitch - Mating="0.039\" (1.00mm)", Price=0.32, Series=SR, Shrouding="Shrouded - 4 Wall", Style="Board to Cable/Wire", Supplier 1=DigiKey, Termination=Solder
J1 J2: "WR-PHD Socket Header, THT, pitch 1.27mm, Dual Row, Vertical, 8p", Contact Resistance=20mOhm, Manufacturer="Wurth Elektronik", Operating Temperature="-40 to +105degC", Rated Current=1A, Withstanding Voltage=500VAC, Working Voltage=250VAC, ComponentLink1Description=Manufacturer, ComponentLink1URL=http://www.we-online.de, ComponentLink2Description=Datasheet, ComponentLink2URL=https://www.we-online.com/catalog/datasheet/62200821821.pdf, Gender="Socket Header", Manufacturer Part Number=62200821821, Mounting Technology=THT, Orientation=Vertical, Packaging=Tube, Pin Number=8, Pitch=1.27mm, Published Date="May 2020", Row Number=Dual, System=Connector
L1: library part MLP2520S4R7ST0S1, "FIXED IND 4.7UH 1A 110 MOHM SMD", Current Rating (Amps)=1A, DC Resistance (DCR)="143mOhm Max", Device Package="1008 (2520 Metric)", Inductance Frequency - Test=2MHz, Manufacturer="TDK Corporation", Operating Temperature="-40°C ~ 125°C", Supplier Part Number 1=445-6378-1-ND, Tolerance=±20%, ComponentLink1Description=Datasheet, ComponentLink1URL=https://product.tdk.com/info/en/catalog/datasheets/inductor_commercial_power_mlp2520_en.pdf?ref_disty=digikey, ComponentLink2Description="DigiKey Link", ComponentLink2URL=http://digikey.com/product-detail/en/tdk-corporation/MLP2520S4R7ST0S1/445-6378-1-ND/2465705, Height - Seated (Max)="0.039\" (1.00mm)", Inductance=4.7µH, LastUpdated="13-Aug-20 11:03:40 AM", Lifecycle Status=Active, Material - Core=Ferrite, Minimum Order=1, Mounting Type="Surface Mount", Package / Case="1008 (2520 Metric)", Packaging=TapeAndReel, Part Number=MLP2520S4R7ST0S1, Part Status=Active, PartId=3467, Price=0.14, Series=MLP, Shielding=Shielded, Size / Dimension="0.098\" L x 0.079\" W (2.50mm x 2.00mm)", Supplier 1=DigiKey, Supplier Device Package="1008 (2520 Metric)", Type=Multilayer
M1 M2 M3: "MOSFET N-CH 100V 170MA SOT23-3", Current - Continuous Drain (Id) @ 25°C="170mA (Ta)", Drain to Source Voltage (Vdss)=100V, Drive Voltage (Max Rds On,  Min Rds On)=10V, Input Capacitance (Ciss) (Max) @ Vds="60pF @ 25V", Manufacturer="Diodes Incorporated", Operating Temperature="-55°C ~ 150°C (TJ)", Package / Case="TO-236-3, SC-59, SOT-23-3", Power Dissipation (Max)="300mW (Ta)", Supplier Device Package=SOT-23-3, Supplier Part Number 1=BSS123-FDICT-ND, ComponentLink1Description=Datasheet, ComponentLink1URL=https://www.diodes.com/assets/Datasheets/ds30366.pdf, ComponentLink2Description="DigiKey Link", ComponentLink2URL=http://digikey.com/product-detail/en/diodes-incorporated/BSS123-7-F/BSS123-FDICT-ND/717842, FET Type=N-Channel, LastUpdated="8/14/2022 10:06:21 PM", Lifecycle Status=Active, Minimum Order=1, Mounting Type="Surface Mount", Packaging=TapeAndReel, Part Number=BSS123-7-F, Part Status=Active, Price=0.05, Rds On (Max) @ Id, Vgs="6Ohm @ 170mA, 10V", Series=-, Supplier 1=DigiKey, Technology="MOSFET (Metal Oxide)", Vgs (Max)=±20V, Vgs(th) (Max) @ Id="2V @ 1mA"
R1 R2 R9 R11 R13 R14 R16_1 R16_2: library part CRCW0402330RJNEDC, "RES 330 OHM 5% 1/16W 0402", Device Package="0402 (1005 Metric)", Manufacturer="Vishay Dale", Operating Temperature="-55°C ~ 155°C", Power (Watts)="0.063W, 1/16W", Resistance="330 Ohms", Supplier Device Package=0402, Supplier Part Number 1=541-4123-1-ND, Temperature Coefficient=±200ppm/°C, Tolerance=±5%, ComponentLink1Description=Datasheet, ComponentLink1URL=http://www.vishay.com/docs/28773/crcwce3.pdf, ComponentLink2Description="DigiKey Link", ComponentLink2URL=https://www.digikey.com/en/products/detail/vishay-dale/CRCW0402330RJNEDC/7928545, Composition="Thick Film", Height - Seated (Max)="0.014\" (0.35mm)", LastUpdated="8/14/2022 9:23:31 PM", Lifecycle Status=Active, Minimum Order=1, Number of Terminations=2, Package / Case="0402 (1005 Metric)", Packaging=CutTape, Part Number=CRCW0402330RJNEDC, Part Status=Active, PartId=15989, Price=0.01, Series=CRCW-C, Size / Dimension="0.039\" L x 0.020\" W (1.00mm x 0.50mm)", Supplier 1=DigiKey
R3 R4: library part ERJ-3EKF21R5V, "RES SMD 21.5 OHM 1% 1/10W 0603", Device Package="0603 (1608 Metric)", Manufacturer="Panasonic Electronic Components", Operating Temperature="-55°C ~ 155°C", Power (Watts)="0.1W, 1/10W", Ratings=AEC-Q200, Resistance="21.5 Ohms", Supplier Device Package=0603, Supplier Part Number 1=P21.5HCT-ND, Temperature Coefficient=±100ppm/°C, Tolerance=±1%, ComponentLink1Description=Datasheet, ComponentLink1URL=https://industrial.panasonic.com/cdbs/www-data/pdf/RDA0000/AOA0000C304.pdf, ComponentLink2Description="DigiKey Link", ComponentLink2URL=http://digikey.com/product-detail/en/panasonic-electronic-components/ERJ-3EKF21R5V/P21.5HCT-ND/198246, Composition="Thick Film", Features="Automotive AEC-Q200", Height - Seated (Max)="0.022\" (0.55mm)", LastUpdated="21-Jan-20 12:16:19 AM", Lifecycle Status=Active, Minimum Order=1, Number of Terminations=2, Package / Case="0603 (1608 Metric)", Packaging=TapeAndReel, Part Number=ERJ-3EKF21R5V, Part Status=Active, PartId=24202, Price=0.01, Series=ERJ, Size / Dimension="0.063\" L x 0.031\" W (1.60mm x 0.80mm)", Supplier 1=DigiKey
R8 R10 R12: library part RNCS0603BKE10K0, "RES 10K OHM 0.1% 1/16W 0603", Device Package="0603 (1608 Metric)", Manufacturer="Stackpole Electronics Inc", Operating Temperature="-55°C ~ 155°C", Power (Watts)="0.063W, 1/16W", Ratings=AEC-Q200, Resistance="10 kOhms", Supplier Device Package=0603, Supplier Part Number 1=RNCS0603BKE10K0CT-ND, Temperature Coefficient=±25ppm/°C, Tolerance=±0.1%, ComponentLink1Description=Datasheet, ComponentLink1URL=https://www.seielect.com/catalog/sei-rncs_rnch.pdf, ComponentLink2Description="DigiKey Link", ComponentLink2URL=https://www.digikey.com/en/products/detail/stackpole-electronics-inc/RNCS0603BKE10K0/1708836, Composition="Thin Film", Features="Anti-Corrosive, Automotive AEC-Q200, Moisture Resistant", Height - Seated (Max)="0.022\" (0.55mm)", LastUpdated="8/14/2022 9:31:27 PM", Lifecycle Status=Active, Minimum Order=1, Number of Terminations=2, Package / Case="0603 (1608 Metric)", Packaging=TapeAndReel, Part Number=RNCS0603BKE10K0, Part Status=Active, PartId=4838, Price=0.08, Series=RNCS, Size / Dimension="0.061\" L x 0.031\" W (1.55mm x 0.80mm)", Supplier 1=DigiKey
U1: library part PIC32MZ0512EFE064-I/PT, "32-bit Microcontrollers - MCU 32-BIT MCU 512KB FL 128KB RAM, No Crypto", Package="TQFP-64 Microchip", Availability=Unavailable, MF=Microchip, MP=PIC32MZ2048EFG064T-I/PT, Price=None, SnapEDA_Link=https://www.snapeda.com/parts/PIC32MZ2048EFG064T-I/PT/Microchip/view-part/565997/?ref=snap
U4: library part AP63205WU-7, "5V fixed step down Buck"
U5_1 U5_2: library part MIC5504-3.3YM5, "3.3V LDO"
U6: "Altimeter"
U7: "EEPROM"
U8: "Magnetometer"
USB1: library part 10118194-0001LF, "USB - micro B USB 2.0 Receptacle Connector 5 Position Surface Mount, Right Angle; Through Hole", Package=None, Availability=Unavailable, MF="Amphenol ICC", MP=10118194-0001LF, Price=None, SnapEDA_Link=https://www.snapeda.com/parts/10118194-0001LF/Amphenol%20FCI/view-part/1413308/?ref=snap
Y1: library part ASD3-27.000MHZ-EC-T, "XTAL OSC XO 27.0000MHZ HCMOS SMD", Current - Supply (Max)=4mA, Frequency Stability=±50ppm, Manufacturer="Abracon LLC", Operating Temperature="-20°C ~ 70°C", Package / Case="4-SMD, No Lead", Supplier Part Number 1=535-9608-1-ND, Voltage - Supply=1.8V, Base Resonator=Crystal, ComponentLink1Description=Datasheet, ComponentLink1URL=https://abracon.com/Oscillators/ASDseries.pdf, ComponentLink2Description="DigiKey Link", ComponentLink2URL=http://digikey.com/product-detail/en/abracon-llc/ASD3-27.000MHZ-EC-T/535-9608-1-ND/1237075, Frequency=27MHz, Function=Enable/Disable, Height - Seated (Max)="0.039\" (1.00mm)", LastUpdated="9/14/2022 8:37:45 AM", Lifecycle Status=Active, Minimum Order=1, Mounting Type="Surface Mount", Output=HCMOS, Packaging=TapeAndReel, Part Number=ASD3-27.000MHZ-EC-T, Part Status=Active, PartId=4, Price=1.74, Series=ASD, Size / Dimension="0.098\" L x 0.079\" W (2.50mm x 2.00mm)", Supplier 1=DigiKey, Type="XO (Standard)"

## Free pads (board coordinates)
  round 1.524 hole 2.2: 1(-13,-13) 1(-13,13) 1(13,-13) 1(13,13)

## Via types
v1: diameter 0.5, hole 0.3, Top Layer to Bottom Layer, tented both sides, 115 vias

## Nets (pads, with @x,y where several pads share a name; then routed paths per layer and width w, separated by ;. In a path a pad name is that pad's centre, name@x,y a point inside that pad or via, vN(x,y) a via of type N, cw(c..) or ccw(c..) an arc to the next point about the centre after c; other vN are vias at no path point)
3V3: C10_2.2 C11_2.2 C28.2 FB1.1 U5_2.5 U7.5 | length 26
  Bottom Layer w0.254: U7.5 -7.65,1.5 -8.087,1.937 -8.087,2.327 C28.2 -8.433,2.673 -8.433,2.875 -8.758,3.2 -12.9,3.2 -13.9,4.2 -13.9,7.7 -12.7,8.9 -12.605,8.9 -12.578,8.927 -9.527,8.927 -8.101,7.501 -7.593,7.501 C11_2.2@-7.4,7.308 ; v1(-7.4,7.3) C11_2.2@-7.4,7.308 ; v1(-6.2,7.3) C10_2.2 ; FB1.1 -1.923,8.777 -3.06,8.777 -4.287,7.55 U5_2.5 -4.95,7.508 -5.098,7.36 C10_2.2 ; C11_2.2@-7.4,7.308 C11_2.2 C10_2.2
3V3_IMU: C10_1.2 C11_1.2 C12.1 C13.1 C14.2 C17.2 C18.2 C29.1 U3.8 U3.13 U5_1.5 U6.1 U6.6 U6.10 U8.5 U8.6 U8.10 | length 56.2
  Top Layer w0.254: U8.10@-14.685,4.543 -14.781,4.543 -14.783,4.541 -14.783,4.502 -14.931,4.353 -15.407,4.353 C12.1 ; C29.1@-14.312,7.172 -14.312,7.008 -14.72,6.6 -15.651,6.6 -16.147,6.104 -16.147,4.561 -15.998,4.413 -15.653,4.413 C12.1 ; C29.1@-14.247,7.073 -14.225,7.073 C29.1@-14.068,6.916 ; C29.1 -14.067,7.273 -14.067,7.475 -13.742,7.8 -11,7.8 -9.463,6.263 -9.463,1.552 -10.065,0.95 U5_1.5@-10.128,0.95 ; U8.6 -14.05,6.393 C29.1@-14.05,6.898 ; U8.6@-14.025,6.393 -13.622,6.393 -13.55,6.321 U8.5 ; C11_1.2@-9.986,-1.506 C11_1.2 ; v1@-6.638,-2.838 -6.704,-2.838 -6.919,-3.053 -7.008,-3.053 -7.055,-3.1 v1(-7.1,-3.1) -7.153,-3.1 -7.453,-2.8 ; v1(-6.6,-2.8) v1@-6.747,-2.8 ; v1@-5.683,-9.723 v1(-5.723,-9.723) -5.7,-9.7 v1@-5.5,-9.7 ; -5.45,-9.289 -5.45,-9.85 -5.3,-10 -3.4,-10 -2.6,-9.2 -2.6,-8.4 -3.152,-7.848 -3.18,-7.848 -3.2,-7.867 -3.393,-7.867 C18.2 ; U6.6 -5.448,-9.065 -5.448,-9.289 ; U6.1@-4.95,-7.529 U6.1 -4.478,-7.538 -4.44,-7.5 ; v1@-4.66,-6.2 v1(-4.7,-6.2) -4.7,-6.24 -4.613,-6.327 -4.613,-6.527 v1(-4.44,-6.7) ; C17.2@-4.613,-6.873 v1(-4.44,-6.7) ; U6.10 U6.10@-4.436,-7.802 ; v1(-3.2,-7.8) -3.34,-7.8 C18.2 ; v1(-1.3,-8.4) -1.353,-8.4 -1.453,-8.5 v1@-1.5,-8.5 ; C14.2 C14.2@0.675,-9.55 ; U3.8 -0.8,-5.8 -1.5,-6.5 v1@-1.5,-8.5 ; U3.13 1.45,-9.55 ; v1(2.36,-9.55) 1.45,-9.55 ; C12.1 -15.5,3.565 -12.885,0.95 U5_1.5@-10.128,0.95 ; U5_1.5@-10.128,0.95 -9.98,0.802 C10_1.2 C11_1.2 ; C11_1.2 -9.807,-1.673 -9.807,-2.093 -9.1,-2.8 -7.453,-2.8 ; -7.453,-2.8 v1@-6.747,-2.8 ; -7.453,-2.8 -7.153,-2.5 v1(-7.1,-2.5) -7.047,-2.5 v1@-6.747,-2.8 ; -4.44,-7.5 v1(-4.44,-6.7) ; -4.44,-7.5 -4.44,-7.798 U6.10@-4.436,-7.802 ; U6.10@-4.436,-7.802 -3.458,-7.802 C18.2 ; v1@-1.5,-8.5 -1.5,-10 -1.205,-10.295 -0.207,-10.295 0.102,-9.985 0.102,-9.973 0.5,-9.575 v1(0.7,-9.575) C14.2@0.675,-9.55 ; C14.2@0.675,-9.55 1.45,-9.55
5V: C2.2 C3.2 C8_1.2 C8_2.2 C9_1.2 C9_2.2 D1.1 GPS_CON.1 I2C1_CON.1 I2C2_CON.1 L1.2 LED.4 R16_1.2 R16_2.2 RF.1 SPI_CON.1 U4.1 U5_1.1 U5_2.1 | length 49.1
  Top Layer w0.254: I2C2_CON.1 -12.7,-7.5 -13.452,-6.748 -13.452,-4.052 -12.8,-3.4 v1(-11.4,-3.4) ; v1(-8.4,0.7) v1(-8.4,1.299) ; v1@-8.347,0.747 -8.137,0.747 -8.082,0.802 -7.738,0.802 U5_1.1 -7.59,0.392 -7.273,0.075 -7.273,-0.127 v1(-7.1,-0.3) C9_1.2 -7,-1.6 -0.85,-1.6 D1.1 ; U5_1.1@-7.55,0.91 U5_1.1@-7.319,0.91 ; U5_1.1@-7.319,0.925 U5_1.1@-7.125,0.925 ; v1@-7.09,0.91 v1@-7,1 ; v1(-6.9,0.9) v1@-7,1 ; R16_1.2 -6.44,1.25 -6.613,1.077 -6.923,1.077 v1@-7,1 ; v1(6.344,10.463) C2.2@6.381,10.425 ; SPI_CON.1 11.841,-4.273 12.473,-4.273 13.5,-5.3 13.5,-6.4 v1(13,-6.9)
  Top Layer w0.712: L1.2 0.325,9.6 3.012,9.6 3.956,10.544 4.106,10.544 U4.1 6.225,10.55 6.312,10.463 v1(6.344,10.463) v1(7.153,10.463) 7.862,10.463 v1(7.9,10.5) C3.2 ; C2.2@6.381,10.425 C2.2
  Bottom Layer w0.254: v1(-7.4,10.04) C8_2.2 -5.098,10.04 -4.95,10.188 U5_2.1 v1(-4.95,10.5) -4.95,11.5 ; C8_2.2@-5.9,10.1 RF.1 -5.795,11.568 -5.727,11.5 -4.95,11.5 ; R16_2.2 -3.675,11.5 -4.95,11.5 ; v1(10.4,-9.1) 10.4,-8.3 11.02,-7.68 11.02,-7.673 11.193,-7.5 GPS_CON.1 11.841,-7.327 12.535,-7.327 12.962,-6.9 v1(13,-6.9) ; I2C1_CON.1@-12,-4.327 v1(-12,-3.4) v1(-11.4,-3.4) -11.4,-4.327 -11.573,-4.5 -11.827,-4.5 I2C1_CON.1@-12,-4.327 ; v1@11.6,8.46 v1(11.6,8.5) v1(12.2,8.5) 12.2,7.973 12.027,7.8 LED.4 11.668,8.392 v1@11.6,8.46
BMP_INT: U1.52 U6.7 | length 6.7
  Top Layer w0.254: U6.7 -4.95,-9.071 -4.649,-9.372 -4.428,-9.372 v1(-4.4,-9.4)
  Bottom Layer w0.127: v1(-4.4,-9.4) -4.351,-9.351 -4.151,-9.351 -3.994,-9.194 -3.994,-7.868 -2.9,-6.774 -2.9,-5.982 -1.907,-4.989 -1.901,-4.989 -1.639,-4.727 U1.52
CON_LED_B: LED.3 M3.3 R12.1 | length 10.1
  Bottom Layer w0.254: 7.562,9.375 7.223,9.035 7.223,7.965 7.452,7.736 7.452,6.948 7.75,6.65 R12.1 ; 7.562,9.4 8.8,9.4 ; M3.3 8.8,9.4 ; LED.3 11.629,6.839 10.661,6.839 9.5,8 9.5,8.7 8.8,9.4
CON_LED_G: LED.2 M2.3 R10.1 | length 5.4
  Bottom Layer w0.254: M2.3 8.05,8.5 R10.1@9.575,6.975 ; R10.1 9.25,6.65 R10.1@9.575,6.975 ; 9.775,6.675 9.775,6.775 ; LED.2 11.495,5.973 10.577,5.973 9.775,6.775 ; R10.1@9.575,6.975 9.775,6.775
CON_LED_R: LED.1 M1.3 R8.1 | length 10.9
  Bottom Layer w0.254: LED.1 11.668,3.704 15.077,0.296 15.077,-0.627 15.127,-0.677 15.35,-0.9 M1.3 12.397,-0.9 12.345,-0.848 12.248,-0.848 11.95,-0.55 R8.1
ESC1: J1.5 U1.21 | length 12.7
  Layer 2 w0.127: v1(-2.1,12.5) -1.813,12.213 -1.813,12.187 0.451,9.923 0.477,9.923 2.741,7.659 2.741,6.381 2.587,6.228 v1(2.587,4.849)
  Bottom Layer w0.127: U1.21 1.903,4.373 2.308,4.779 2.518,4.779 v1(2.587,4.849)
  Bottom Layer w0.254: v1(-2.1,12.5) J1.5
ESC2: J1.3 U1.22 | length 14.1
  Layer 2 w0.127: v1(-1.3,12.4) -0.5,12.4 3.3,8.6 3.3,6.816 3.077,6.594 3.077,5.859 3.287,5.65 v1(3.287,4.813)
  Bottom Layer w0.127: U1.22 2.346,4.02 2.653,4.327 2.8,4.327 v1(3.287,4.813)
  Bottom Layer w0.254: v1(-1.3,12.4) -1.272,12.428 -0.902,12.428 J1.3
ESC3: J2.5 U1.18 | length 27.5
  Layer 2 w0.127: v1(0.6,-12.3) 1.9,-12.3 6.427,-7.773 6.427,-4.604 6,-4.177 6,-1 5.7,-0.7 5.7,0 0.9,4.8 v1(0.9,6.587)
  Bottom Layer w0.254: v1(0.6,-12.3) 0.617,-12.318 0.617,-13.947 J2.5 ; U1.18 0.838,5.438 1.207,5.808 1.207,6.213 0.9,6.52 v1(0.9,6.587)
ESC4: J2.3 U1.17 | length 26.8
  Layer 2 w0.127: v1(-0.6,-12.3) 0.5,-11.2 2.13,-11.2 6.1,-7.23 6.1,-4.919 5.6,-4.419 5.6,-1.1 5.373,-0.873 5.373,-0.173 0.1,5.1 v1(0.1,6.1)
  Bottom Layer w0.254: J2.3 -0.617,-13.947 -0.617,-12.318 v1(-0.6,-12.3) ; v1(0.1,6.1) 0.446,5.754 0.45,5.754 U1.17
GATE_LED_B: R14.2 U1.5 | length 27.6
  Layer 2 w0.127: v1(-5.601,2.441) -5.601,2.478 -5.8,2.677 -5.8,3.091 -5.601,3.29 -5.601,7.583 -3.9,9.285 v1(-3.9,12.8)
  Bottom Layer w0.127: v1(-5.601,2.441) -5.549,2.389 -4.921,2.389 -4.431,1.899 U1.5
  Bottom Layer w0.254: v1(-3.9,12.8) -3.055,13.645 -3.055,15.255 -2.248,16.062 5.649,16.062 7.577,14.134 7.577,14.073 7.75,13.9 R14.2
GATE_LED_G: R13.2 U1.10 | length 17.4
  Layer 2 w0.127: v1(-3.1,4.8) -2.545,4.8 -2.354,4.609 -2.136,4.609 0.355,7.1 1.145,7.1 1.5,6.745 1.5,4.7 2.3,3.9 3.1,3.9 3.895,4.695 3.895,8.595 v1(4.7,9.4)
  Bottom Layer w0.127: v1(-3.1,4.8) -3.1,4.741 -2.924,4.564 -2.924,4.073 -2.606,3.755 U1.10 ; R13.2 v1(4.7,9.4)
GATE_LED_R: R9.2 U1.23 | length 14.3
  Layer 2 w0.127: v1(4.7,5.7) 4.781,5.7 7.2,3.281 v1(7.2,-0.1)
  Bottom Layer w0.127: U1.23 3.039,4.1 3.3,4.1 4.629,5.429 4.629,5.629 v1(4.7,5.7)
  Bottom Layer w0.254: v1(7.2,-0.1) 7.238,-0.138 7.438,-0.138 9.03,-1.73 10.655,-1.73 R9.2
GND: C2.1 C3.1 C4.1 C5.2 C6.2 C7.1 C8_1.1 C8_2.1 C9_1.1 C9_2.1 C10_1.1 C10_2.1 C11_1.1 C11_2.1 C12.2 C13.2 C14.1 C15.2 C16.2 C17.1 C18.1 C20.1 C21.1 C22.1 C23.1 C24.1 C25.2 C26.1 C27.1 C28.1 C29.2 C30.2 GPS_CON.2 I2C1_CON.2 I2C2_CON.2 ICSP.3 J1.1 J1.7 J2.1 J2.7 M1.2 M2.2 M3.2 R4.1 RF.2 SPI_CON.2 U1.7 U1.20 U1.25 U1.35 U1.40 U1.55 U1.59 U1.65 U3.1 U3.9 U3.11 U3.18 U3.25 U4.4 U5_1.2 U5_2.2 U6.3 U6.5 U6.8 U6.9 U7.2 U8.2 U8.3 U8.9 U8.12 USB1.5 USB1.S1 USB1.S2 USB1.S3 USB1.S4 USB1.S5 USB1.S6 Y1.2 | length 144.6
  Top Layer w0.127: U6.5 -5.901,-8.738 -5.761,-8.738 -5.323,-8.3 ; U6.3 -5.901,-7.862 -5.761,-7.862 -5.323,-8.3 ; U6.9 -5.323,-8.3 ; U3.25@2.45,-6.3 U3.25 ; U3.25@2.7,-6.6 U3.25 ; U3.25@3.873,-5.377 3.15,-6.1 U3.25 ; U3.1@3.936,-4.563 U3.1
  Top Layer w0.254: C12.2 -15.403,5.043 -13.55,5.043 ; U8.12 -13.55,5.043 ; C29.2@-13.345,7.093 -11.862,7.093 -11.438,6.668 v1@-11.438,6.298 ; v1(-12.875,-5.926) -12.849,-5.952 -12.849,-6.351 -12.7,-6.5 I2C2_CON.2 ; C30.2 -12.12,5.36 -12.31,5.55 -13.35,5.55 -13.55,5.35 -13.55,5.043 ; v1(-11.3,6.1) v1@-11.438,6.1 ; v1(-10.4,6.3) -10.402,6.298 v1@-11.438,6.298 ; v1(-10.3,2.1) -10.347,2.147 -10.825,2.147 -12.1,3.423 C30.2@-12.1,5.353 ; U5_1.2 -8.7,1.9 -9,1.6 -9,-0.2 C10_1.1 ; U6.9 U6.8 -3.46,-8.8 C18.1 v1(-3.177,-8.74) ; C14.1 -0.6,-9.275 C15.2 -0.427,-7.617 -0.129,-7.617 0.188,-7.3 U3.11 U3.25@1.95,-7.3 ; U3.9 2.45,-6.3 2.65,-6.1 3.15,-6.1 v1(3.2,-6.1) ; v1(2.1,-7.4) 2,-7.3 U3.25@2.7,-6.6 ; U3.25 3.873,-7.723 3.873,-7.961 3.923,-8.011 3.923,-8.085 3.95,-8.112 U3.18 ; C13.2 3.24,-9.53 3.413,-9.357 3.793,-9.357 3.95,-9.2 U3.18 ; U3.25@3.873,-5.377 3.873,-5.139 3.923,-5.089 3.923,-5.015 3.95,-4.988 U3.1 ; C16.2 5.95,-8.925 5.575,-8.55 U3.18 ; SPI_CON.2 11.841,-5.273 12.573,-5.273 12.862,-5.562 12.862,-5.762 v1(12.9,-5.8) ; -13.55,5.043 -13.543,5.05 U8.2 -12.43,5.05 -12.127,5.353 C30.2@-12.1,5.353 ; C30.2@-12.1,5.353 -12.085,5.353 -11.912,5.526 -11.709,5.526 -11.438,5.798 v1@-11.438,6.1 ; v1@-11.438,6.1 v1@-11.438,6.298 ; C10_1.1 C8_1.1 C9_1.1 C11_1.1 C10_1.1
  Top Layer w0.712: U4.4 1.902,12.452 1.902,13.962 J1.1 1.96,13.91 3.49,13.91 C4.1 3.762,13.762 5.237,13.762 C5.2 ; C2.1 6.494,11.869 7.769,11.869 C3.1
  Bottom Layer w0.127: C25.2 -5.675,3.803 -5.34,3.803 -4.826,3.289 C24.1 ; U1.65@-1.768,0 v1(-1.7,0) -1.061,0 v1(0,0) ; U1.65@0,-1.061 v1(0,0) ; U1.65@0,3.182 v1(0,0) ; U1.65@3.889,0 v1(3.4,0) v1(1.8,0) 0.354,0 v1(0,0) ; U1.35 U1.35@5.295,-1.405
  Bottom Layer w0.254: v1(-12.875,-5.926) -12.828,-5.879 -12.522,-5.879 -12.143,-5.5 I2C1_CON.2 -10.1,-5.5 -8.6,-4 -8.6,-3.6 ; ICSP.3 v1(-10.4,6.3) ; v1(-9.8,-3.6) -8.6,-3.6 ; v1(-9.8,10.6) -9.772,10.628 -9.557,10.628 -9.527,10.658 ; C28.1 -9.9,2.5 -10.5,1.9 -10.5,0.2 -10.1,-0.2 -9.5,-0.2 -8.773,-0.927 -8.773,-1.327 U7.2 -8.6,-3.6 ; RF.2 -7.073,11.741 -7.073,12.773 -7.577,13.277 -9.139,13.277 -9.527,12.889 -9.527,10.658 ; C10_2.1 C10_2.1@-6.22,8.24 ; C8_2.1 C8_2.1@-6.24,9.16 ; C24.1 -4.565,3.289 -4.251,2.975 -4.04,2.975 -3.671,2.606 U1.7 U1.65@-1.061,0 ; v1(-4.689,-3.111) -4.689,-2.925 -4.02,-2.256 U1.59 U1.65@-1.768,0 ; U5_2.2 -4,9.4 -4.4,9 C8_2.1@-6.227,9 ; C21.1 v1(-3.597,-4.175) -3.352,-4.175 -3.213,-4.036 -2.979,-4.036 -2.61,-3.666 U1.55 U1.65@0,-1.061 ; U1.65@0,3.182 U1.20 2.165,5.347 2.224,5.347 2.566,5.689 C7.1@2.766,5.689 ; v1(0.3,8.2) 0.34,8.2 0.44,8.1 R4.1 ; C6.2 1.625,8.125 R4.1 ; C7.1@2.789,5.711 C7.1@2.766,5.689 ; U1.65@3.889,0 U1.35 ; C26.1 C26.1@3.975,3.897 ; C26.1@4.219,3.897 C26.1@3.975,3.897 ; U1.35@5.295,-1.405 5.886,-1.997 6.175,-1.997 C23.1 ; C20.1 5.066,-4.411 4.923,-4.554 4.539,-4.554 3.923,-3.938 3.923,-3.57 U1.40 0.354,0 U1.25 3.975,3.621 C26.1@3.975,3.897 ; v1(6,9.4) M2.2 ; v1(6.8,4.7) 6.828,4.672 6.828,4.594 C27.1 ; C27.1@7.166,4.011 C27.1 ; C27.1@7.67,3.997 7.425,3.997 C27.1 ; Y1.2 9.162,-0.186 9.162,-0.662 v1(9.2,-0.7) ; GPS_CON.2 11.841,-6.327 12.573,-6.327 12.862,-6.038 12.862,-5.838 v1(12.9,-5.8) ; -9.527,10.658 -8.229,9.36 -8.228,9.36 -8.101,9.233 -7.473,9.233 C9_2.1 ; C9_2.1 C8_2.1@-6.24,9.16 ; C9_2.1 C11_2.1 C10_2.1@-6.22,8.24 ; C8_2.1@-6.24,9.16 -6.4,9 C8_2.1@-6.227,9 ; C8_2.1@-6.227,9 -6.22,8.993 C10_2.1@-6.22,8.24 ; R4.1 1.65,8.05 2.198,7.502 2.198,7.217 2.954,6.461 2.954,6.077 2.811,5.934 C7.1 C7.1@2.766,5.689
  other v1: -3.56,-6.7 0,-3.3 1.1,-2.7 -2.4,-0.948 2.5,-0.9 -3.3,0 13.6,0 -1.9,1.7 0,3.4 9.75,12.8
GPS.RX: GPS_CON.3 U1.43 | length 15.2
  Bottom Layer w0.127: U1.43 3.332,-5.1 3.5,-5.1 4.973,-6.573 7.009,-6.573 9.782,-3.8 12.5,-3.8 12.847,-4.147 12.847,-5.053 12.636,-5.264 11.904,-5.264 GPS_CON.3
GPS.TX: GPS_CON.4 U1.46 | length 14.1
  Bottom Layer w0.127: U1.46 1.6,-5.489 1.6,-6 3.5,-7.9 8.7,-7.9 9.3,-7.3 9.3,-6 10.777,-4.523 11.645,-4.523 GPS_CON.4
I2C.SCL: I2C1_CON.3 I2C2_CON.3 R2.1 U1.42 U3.23 U6.2 U7.1 U8.1 | length 68.8
  Top Layer w0.127: U8.1 -12.9,2.674 v1(-12.313,2.087) ; I2C2_CON.3 -12.143,-5.5 -12.8,-4.843 -12.8,-4.184 -12.552,-3.937 -10.463,-3.937 -10.227,-4.173 -7.818,-4.173 -6.655,-5.336 v1(-6.655,-6.545) ; v1@-6.609,-6.545 -6.549,-6.606 -6.382,-6.606 -5.524,-7.464 -5.512,-7.464 -5.45,-7.525 U6.2 ; U3.23 4.737,-5.861 5.288,-5.861 5.486,-6.06 v1(5.587,-6.06)
  Layer 2 w0.127: v1(-12.313,2.087) -12.361,2.087 -12.887,2.613 -13.313,2.613 -13.613,2.313 -13.613,-0.187 -10.6,-3.2 -10.6,-6.6 -8.387,-8.814 -6.723,-8.814 -6.655,-8.745 ; v1(-6.655,-6.545) -6.655,-8.745 ; v1(5.587,-6.06) 5.587,-6.913 3.7,-8.8 0.631,-8.8 -0.569,-10 -4.719,-10 -5.51,-9.209 -6.191,-9.209 -6.655,-8.745
  Bottom Layer w0.127: I2C1_CON.3 -7.65,-6.5 ; U7.1 -7.65,-6.5 ; v1(-6.655,-6.545) -6.7,-6.5 -7.65,-6.5 ; U1.42 2.606,-3.671 4.995,-6.06 5.459,-6.06 5.6,-6.2 5.74,-6.06 6.411,-6.06 8.86,-3.611 8.86,-2.66 R2.1 ; v1@5.587,-6.2 v1(5.587,-6.06)
I2C.SDA: I2C1_CON.4 I2C2_CON.4 R1.1 U1.41 U3.24 U6.4 U7.3 U8.11 | length 57.7
  Top Layer w0.127: U8.11 -14.05,3.05 v1(-13.1,2.1) ; I2C2_CON.4 -11.468,-4.7 -9.864,-4.7 -7.3,-7.264 v1(-7.3,-8.3) U6.4 ; U3.24 4.705,-5.33 5.557,-5.33 v1(5.587,-5.36)
  Layer 2 w0.127: v1(-13.1,2.1) -13.1,1.2 -9,-2.9 -9,-3.8 -7.3,-5.5 ; v1(-7.3,-8.3) -7.3,-5.5 ; v1(5.587,-5.36) 5.098,-5.36 4.638,-4.9 -1.8,-4.9 -2.4,-5.5 -7.3,-5.5
  Bottom Layer w0.127: U7.3 -10.9,-1.5 -13.4,-4 -13.4,-6.5 -12.4,-7.5 I2C1_CON.4 -7.8,-7.5 -7.362,-7.938 -7.362,-8.238 v1(-7.3,-8.3) ; U1.41 3.469,-3.823 3.469,-4.069 4.76,-5.36 v1(5.587,-5.36) ; v1@5.623,-5.323 5.66,-5.36 6.14,-5.36 R1.1
INT.INT_LIS3: U1.53 U8.8 | length 21.2
  Top Layer w0.127: v1(-15.4,5.9) -15.336,5.9 -15.139,5.704 -15.071,5.704 -14.979,5.612 -14.761,5.612 U8.8
  Layer 2 w0.127: v1(-15.4,5.9) -14.9,5.9 -8.3,-0.7 -8.3,-3.2 -6.552,-4.948 v1(-4.6,-4.948)
  Bottom Layer w0.127: v1(-4.6,-4.948) -3.948,-5.6 -2.981,-5.6 -2.287,-4.906 -2.287,-4.762 U1.53
INT.INT_MPU: U1.51 U3.12 | length 5.9
  Top Layer w0.254: v1(0.4,-8.25) 0.428,-8.222 0.428,-7.848 0.476,-7.8 U3.12
  Layer 2 w0.127: v1(-2.3,-6.2) -1.65,-6.2 v1(0.4,-8.25)
  Bottom Layer w0.127: v1(-2.3,-6.2) -2.3,-6.195 -1.191,-5.086 U1.51
MCLR: C25.1 ICSP.1 R11.1 U1.9 | length 17.4